# Altium PCB BaseArduino.PcbDoc
Units mm, origin at the board's own origin, x right, y up, seen from the top; angles counter-clockwise.
Board outline 68.58 x 53.34 mm, 2 copper layers (Top Layer, Bottom Layer); 43 components, 30 nets, 126 pads, 6 vias.
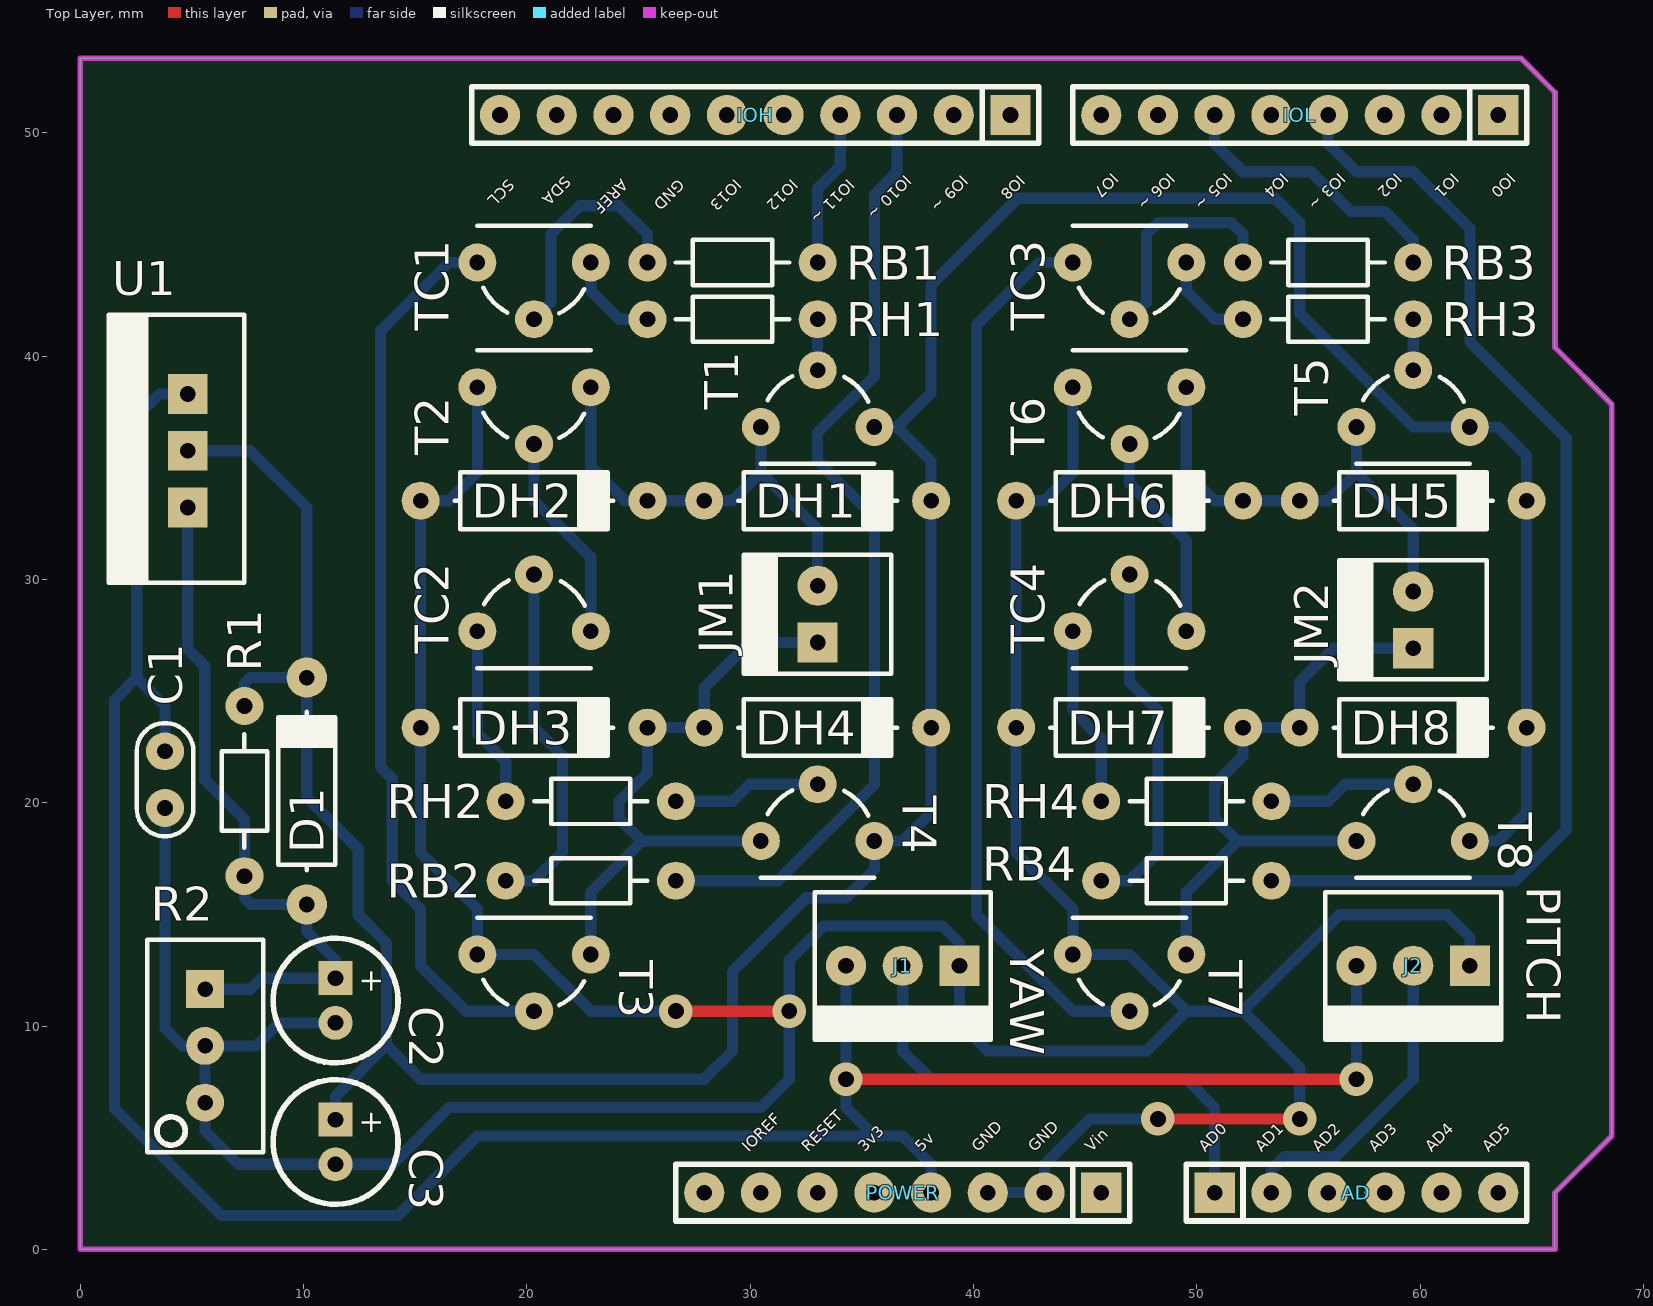
[diagram p0: Top Layer view]
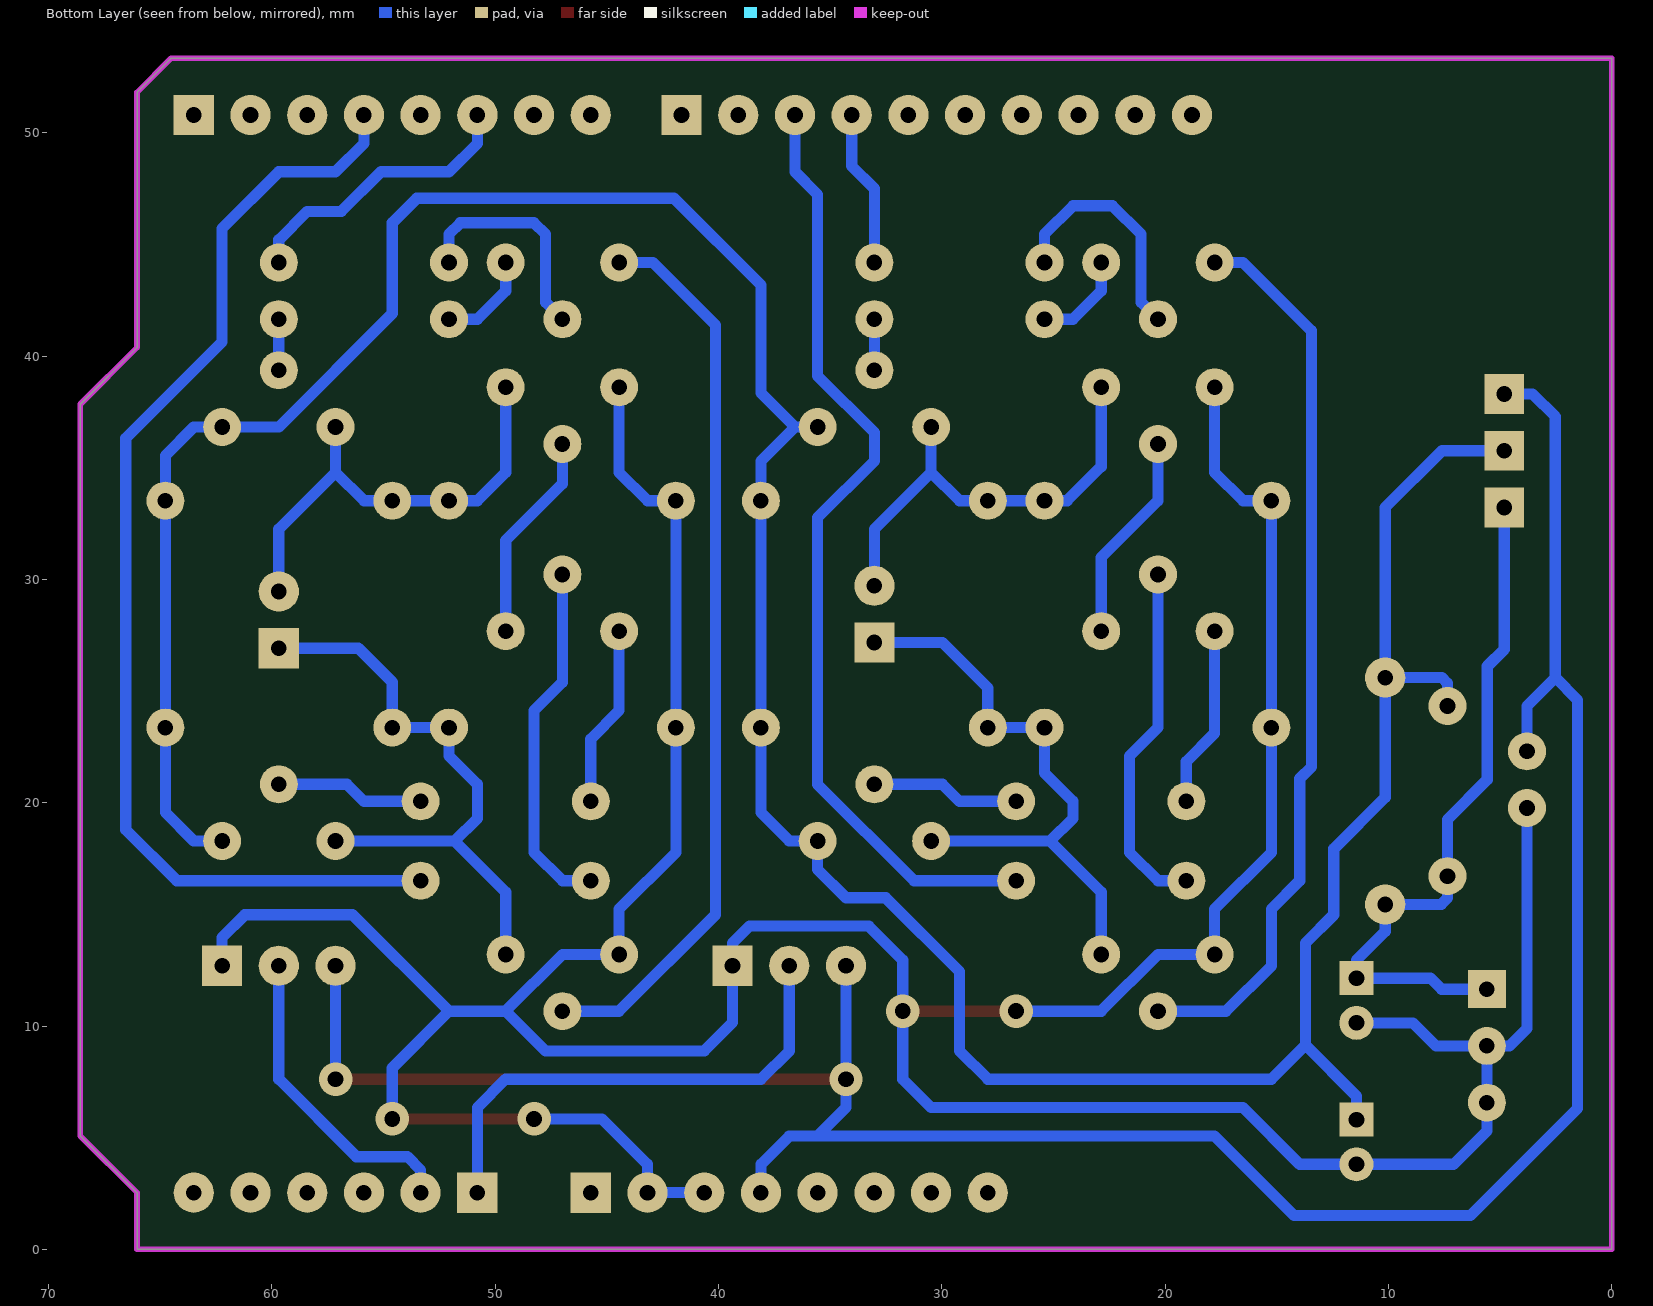
[diagram p1: Bottom Layer view, seen from below]
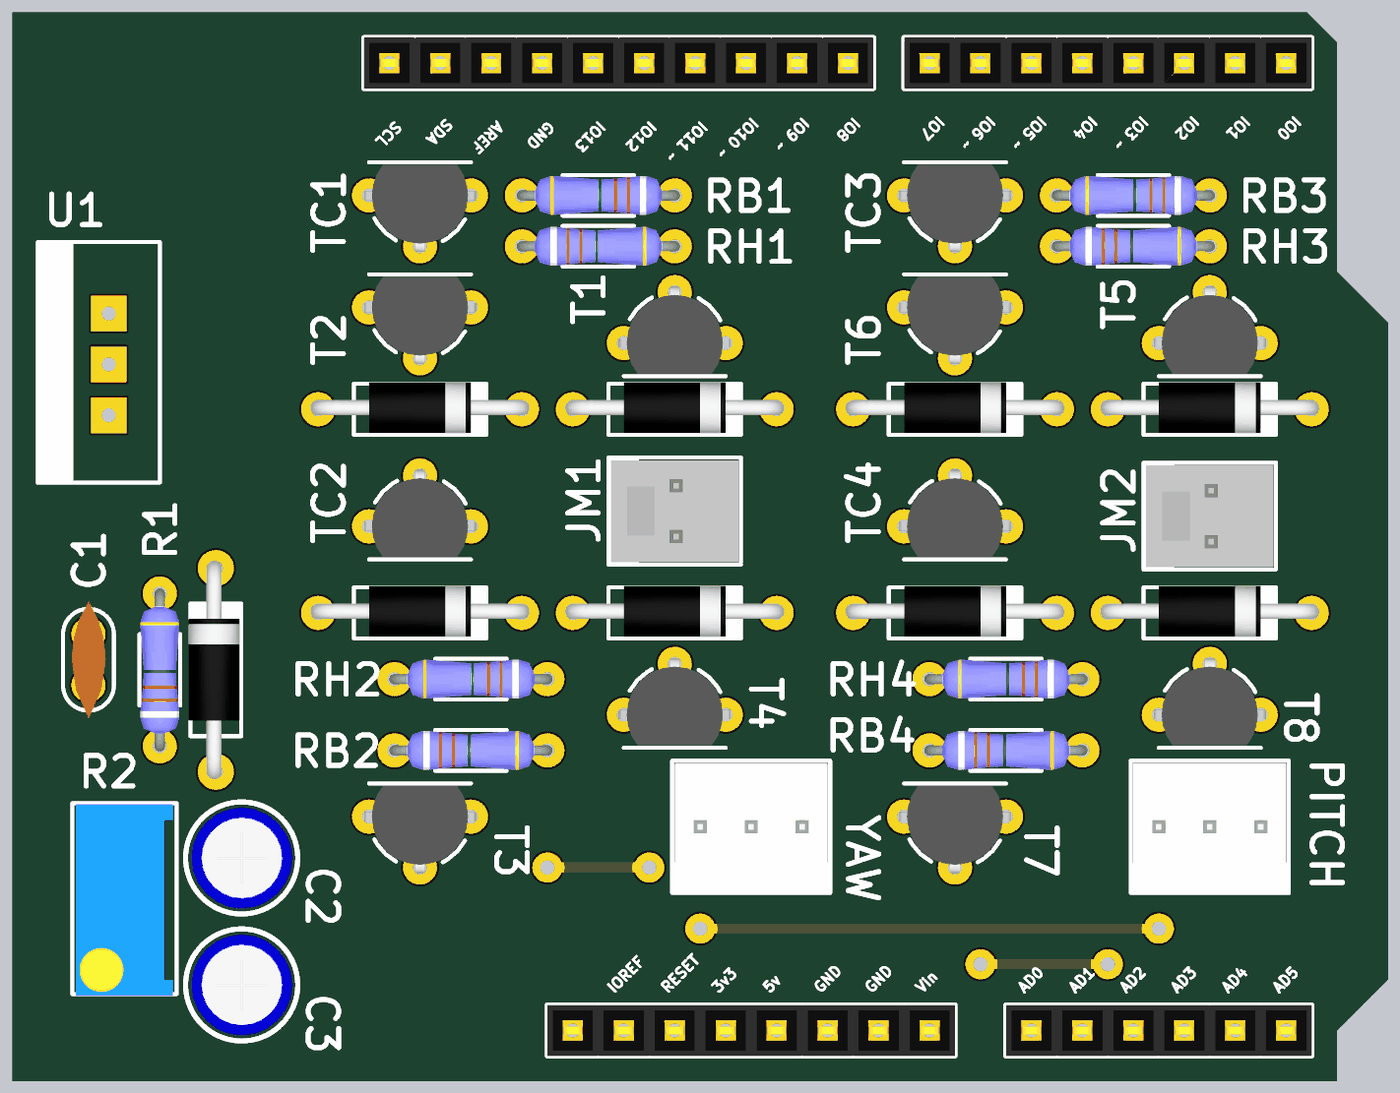
[diagram p2: 3D render of the assembled board from above, using the file's embedded part models]

## Layer stack, top to bottom
Top Solder: solder mask 0.0102, Solder Resist, Dk 3.5
Top Layer: signal copper 0.0356
Dielectric 1: dielectric 0.32, FR-4, Dk 4.8
Bottom Layer: signal copper 0.0356
Bottom Solder: solder mask 0.0102, Solder Resist, Dk 3.5

## Board outline
0,0 0,53.34 64.516,53.34 66.04,51.816 66.04,40.386 68.58,37.846 68.58,5.08 66.04,2.54 66.04,0

## Design rules (kind name [scope] priority, off if disabled: settings)
Clearance [All] p1: gap=0.4 ignorepadtopadclearanceinfootprint=FALSE
PolygonConnect [All] p1: connectstyle=Relief reliefconductorwidth=0.254 reliefentries=4 polygonreliefangle="90 Angle" airgapwidth=0.254
RoutingVias [All] p1: holewidth=0.711 width=1.5 viastyle="Through Hole" minholewidth=0.711 minwidth=1.5 maxholewidth=0.711 maxwidth=1.5
SolderMaskExpansion [All] p1: expansion=0.102
Width [All] p1: maxlimit=0.5 minlimit=0.5 preferedwidth=0.5
30 further rules are at their usual default settings.

## Components (designator, comment, footprint, x,y, rotation, side; value= is the part's Value field where it differs from the comment)
AD "AD" "Header 6x1 8.5mm" 50.8,2.54 r0 top
C1 "0.1u" CAP100 3.794,21.034 r270 top
C2 "10u" CAP100RP 11.43,11.144 r270 top
C3 "1u" CAP100RP 11.43,4.81 r270 top
D1 "1N4002" DO41#1 10.144,20.526 r90 top
DH1 "1N4148" DO41#2 33.02,33.528 r0 top
DH2 "1N4148" DO41#2 20.32,33.528 r0 top
DH3 "1N4148" DO41#2 20.32,23.368 r0 top
DH4 "1N4148" DO41#2 33.02,23.368 r0 top
DH5 "1N4148" DO41#2 59.69,33.528 r0 top
DH6 "1N4148" DO41#2 46.99,33.528 r0 top
DH7 "1N4148" DO41#2 46.99,23.368 r0 top
DH8 "1N4148" DO41#2 59.69,23.368 r0 top
IOH "IOH" "Header 10x1 8.5mm" 41.656,50.8 r180 top
IOL "IOL" "Header 8x1 8.5mm" 63.5,50.8 r180 top
J1 "YAW" MOLEX3 39.37,12.7 r180 top
J2 "PITCH" MOLEX3 62.23,12.7 r180 top
JM1 "MOTOR" MOLEX2 33.02,27.178 r90 top
JM2 "MOTOR" MOLEX2 59.69,26.924 r90 top
POWER "POWER_UNO" "Header 8x1 8.5mm" 45.72,2.54 r180 top
R1 "220" RES300 7.35,16.716 r90 top
R2 "5K" "PRESET V" 5.588,9.112 r270 top
RB1 "1K" RES300 33.02,44.196 r180 top
RB2 "1K" RES300 19.05,16.51 r0 top
RB3 "1K" RES300 59.69,44.196 r180 top
RB4 "1K" RES300 45.72,16.51 r0 top
RH1 "27" RES300 25.4,41.656 r0 top
RH2 "27" RES300 26.67,20.066 r180 top
RH3 "27" RES300 52.07,41.656 r0 top
RH4 "27" RES300 53.34,20.066 r180 top
T1 "2N3906" TO92 33.02,38.1 r180 top
T2 "2N3904" TO92 20.32,37.338 r0 top
T3 "2N3904" TO92 20.32,11.938 r0 top
T4 "2N3906" TO92 33.02,19.558 r180 top
T5 "2N3906" TO92 59.69,38.1 r180 top
T6 "2N3904" TO92 46.99,37.338 r0 top
T7 "2N3904" TO92 46.99,11.938 r0 top
T8 "2N3906" TO92 59.69,19.558 r180 top
TC1 "2N3904" TO92 20.32,42.926 r0 top
TC2 "2N3904" TO92 20.32,28.956 r180 top
TC3 "2N3904" TO92 46.99,42.926 r0 top
TC4 "2N3904" TO92 46.99,28.956 r180 top
U1 "LM317" "TO-220 V" 4.81,35.766 r90 top

## Footprints (in the part's own frame and the unit in brackets; to place one, negate y for a bottom-side part, rotate by r counter-clockwise, add the part's x,y. Pads: shape width x height; smd on the part's side, far side on the other; paste and mask are expansions set on the pad)
CAP100 [mm]
  round 1.7 hole 0.7: 1(-1.27,0) 2(1.27,0)
  silkscreen extent -2.54,-1.27 2.54,1.27, body extent -2.92,-0.84 2.92,0.86, height 6.12
CAP100RP [mm] "Body diameter 5mm"
  rect 1.524x1.524 hole 0.7: 1(-1,0)
  round 1.524 hole 0.7: 2(1,0)
  silkscreen extent -2.79,-2.79 2.79,2.79, body extent -2.53,-2.51 2.53,2.54, height 11.53
DO41#1 [mm]
  round 1.8 hole 0.7: 1(-5.08,0) 2(5.08,0)
  silkscreen extent -3.56,-1.27 3.56,1.27, body extent -5.46,-1.19 5.46,1.37, height 2.03
DO41#2 [mm]
  round 1.7 hole 0.7: 1(-5.08,0) 2(5.08,0)
  silkscreen extent -3.56,-1.27 3.56,1.27, body extent -5.46,-1.19 5.46,1.37, height 2.03
"Header 6x1 8.5mm" [mm] "Stackable 6 pin header"
  rect 1.8x1.8 hole 0.7: 1(0,0)
  round 1.8 hole 0.7: 2(2.54,0) 3(5.08,0) 4(7.62,0) 5(10.16,0) 6(12.7,0)
  silkscreen extent -1.27,-1.27 13.97,1.27, body extent -1.27,-1.27 13.97,1.27, height 8.5
"Header 8x1 8.5mm" [mm] "Stackable 8 pin header"
  rect 1.8x1.8 hole 0.7: 1(0,0)
  round 1.8 hole 0.7: 2(2.54,0) 3(5.08,0) 4(7.62,0) 5(10.16,0) 6(12.7,0) 7(15.24,0) 8(17.78,0)
  silkscreen extent -1.27,-1.27 19.05,1.27, body extent -1.27,-1.27 19.05,1.27, height 8.5
"Header 10x1 8.5mm" [mm] "Stackable 10 pin header"
  rect 1.8x1.8 hole 0.7: 1(0,0)
  round 1.8 hole 0.7: 2(2.54,0) 3(5.08,0) 4(7.62,0) 5(10.16,0) 6(12.7,0) 7(15.24,0) 8(17.78,0) 9(20.32,0) 10(22.86,0)
  silkscreen extent -1.27,-1.27 24.13,1.27, body extent -1.27,-1.27 24.13,1.27, height 8.5
MOLEX2 [mm]
  rect 1.8x1.8 hole 0.7: 1(0,0)
  round 1.8 hole 0.7: 2(2.54,0)
  silkscreen extent -1.4,-3.3 3.94,3.3, body extent -1.27,-3.17 3.81,3.18, height 10.74
MOLEX3 [mm]
  rect 1.8x1.8 hole 0.7: 1(0,0)
  round 1.8 hole 0.7: 2(2.54,0) 3(5.08,0)
  silkscreen extent -1.4,-3.3 6.48,3.3, body extent -1.27,-3.17 6.35,3.18, height 10.74
"PRESET V" [mm]
  rect 1.7x1.7 hole 0.7: 1(-2.54,0)
  round 1.7 hole 0.7: 2(0,0) 3(2.54,0)
  silkscreen extent -4.76,-2.6 4.76,2.6, body extent -4.7,-2.42 4.83,2.42, height 11.55
RES300 [mm]
  round 1.7 hole 0.7: 1(0,0) 2(7.62,0)
  silkscreen extent 1.27,-1.02 6.35,1.02, body extent -0.25,-0.97 7.87,0.97, height 2.01
TO92 [mm]
  round 1.7 hole 0.7: 1(0,-1.27) 2(2.54,1.27) 3(-2.54,1.27)
  silkscreen extent -2.54,-1 2.54,2.92, body extent -2.79,-1.55 2.79,2.79, height 8
"TO-220 V" [mil]
  rect 70x70 hole 27.56: 1(-100,0) 2(0,0) 3(100,0)
  silkscreen extent -232,-100 240,139, body extent -197,-79 197,118, height 709

## Part data
C1: library part CAP
C2 C3: library part CAPPOL
D1: library part DIODO
DH1 DH2 DH3 DH4 DH5 DH6 DH7 DH8: library part "DIODO SCHOTTKY"
J1 J2: library part MOLEX3
JM1 JM2: library part MOLEX2
R1 RB1 RB2 RB3 RB4 RH1 RH2 RH3 RH4: library part RES
R2: library part PRESET
T1 T4 T5 T8: library part "TRANSISTOR PNP"
T2 T3 T6 T7 TC1 TC2 TC3 TC4: library part "TRANSISTOR NPN"
U1: "IC REG ADJ 1.5A 3 TERM TO-220"

## Via types
v1: diameter 1.5, hole 0.711, Top Layer to Bottom Layer, 6 vias

## Nets (pads, with @x,y where several pads share a name; then routed paths per layer and width w, separated by ;. In a path a pad name is that pad's centre, name@x,y a point inside that pad or via, vN(x,y) a via of type N, cw(c..) or ccw(c..) an arc to the next point about the centre after c; other vN are vias at no path point)
3V7: C3.1 D1.2 DH1.2 DH4.2 DH5.2 DH8.2 R1.2 T1.3 T4.3 T5.3 T8.3 U1.2 | length 153.3
  Bottom Layer w0.5: U1.2 7.604,35.766 10.144,33.226 D1.2 ; R1.2 7.35,25.352 7.604,25.606 D1.2 ; C3.1 11.43,6.858 13.716,9.144 ; T1.3 36.576,36.83 ; T8.3 63.5,18.288 64.77,19.558 DH8.2 DH5.2 64.77,35.56 63.5,36.83 T5.3 59.69,36.83 54.61,41.91 54.61,45.974 53.51,47.074 41.994,47.074 38.1,43.18 38.1,38.354 36.576,36.83 ; D1.2 10.144,20.24 12.446,17.938 12.446,14.986 13.716,13.716 13.716,9.144 ; 13.716,9.144 15.24,7.62 27.94,7.62 29.21,8.89 29.21,12.446 32.512,15.748 34.29,15.748 35.56,17.018 T4.3 36.83,18.288 38.1,19.558 DH4.2 DH1.2 38.1,35.306 36.576,36.83
5V: C1.1 J1.3 J2.3 POWER.4 U1.3 | length 115.8
  Top Layer w0.5: v1(34.29,7.62) v1(57.15,7.62)
  Bottom Layer w0.5: C1.1 3.794,24.336 2.524,25.606 ; U1.3 3.54,38.306 2.524,37.29 2.524,25.606 ; J1.3 v1(34.29,7.62) 34.29,6.35 35.56,5.08 ; POWER.4 38.1,3.81 36.83,5.08 35.56,5.08 ; v1(57.15,7.62) J2.3 ; 2.524,25.606 1.524,24.606 1.524,6.318 6.318,1.524 14.224,1.524 17.78,5.08 35.56,5.08
GND: C1.2 C2.2 C3.2 DH2.1 DH3.1 DH6.1 DH7.1 J1.1 J2.1 POWER.2 POWER.3 R2.2 R2.3 T2.3 T3.3 T6.3 T7.3 | length 195.1
  Top Layer w0.5: v1(26.67,10.668) v1(31.75,10.668) ; v1(48.26,5.842) v1(54.61,5.842)
  Bottom Layer w0.5: C1.2 3.794,9.89 4.572,9.112 R2.2 ; C2.2 8.906,10.144 7.874,9.112 R2.2 ; T2.3 17.78,34.798 16.51,33.528 DH2.1 DH3.1 15.24,17.78 17.78,15.24 T3.3 20.32,13.208 22.86,10.668 v1(26.67,10.668) ; POWER.3 POWER.2 43.18,3.81 45.212,5.842 v1(48.26,5.842) ; T6.3 44.45,34.798 43.18,33.528 DH6.1 DH7.1 41.91,17.78 44.45,15.24 T7.3 46.99,13.208 49.53,10.668 ; v1(54.61,5.842) 54.61,8.128 52.07,10.668 ; J2.1 62.23,13.97 61.214,14.986 56.388,14.986 52.07,10.668 ; R2.2 R2.3 5.588,5.302 7.08,3.81 C3.2 13.97,3.81 16.51,6.35 30.48,6.35 31.75,7.62 v1(31.75,10.668) 31.75,12.954 33.274,14.478 38.608,14.478 39.37,13.716 J1.1 39.37,10.16 40.64,8.89 47.752,8.89 49.53,10.668 ; 49.53,10.668 52.07,10.668
ML1: IOL.6 RB3.1 | length 13
  Bottom Layer w0.5: IOL.6 50.8,49.53 52.07,48.26 55.118,48.26 56.896,46.482 58.42,46.482 59.69,45.212 RB3.1
ML2: IOL.4 RB4.2 | length 52.1
  Bottom Layer w0.5: RB4.2 64.262,16.51 66.548,18.796 66.548,36.322 62.23,40.64 62.23,45.72 59.69,48.26 57.15,48.26 55.88,49.53 IOL.4
MR1: IOH.4 RB1.1 | length 7
  Bottom Layer w0.5: RB1.1 33.02,47.498 34.036,48.514 IOH.4
MR2: IOH.3 RB2.2 | length 43.2
  Bottom Layer w0.5: RB2.2 31.242,16.51 35.56,20.828 35.56,32.766 33.02,35.306 33.02,36.576 35.56,39.116 35.56,47.244 36.576,48.26 IOH.3
NetC2_1: C2.1 D1.1 R1.1 R2.1 U1.1 | length 31.3
  Bottom Layer w0.5: U1.1 4.81,26.876 5.572,26.114 5.572,21.034 7.35,19.256 R1.1 7.35,15.732 7.636,15.446 D1.1 10.144,14.24 11.43,12.954 C2.1 8.112,12.144 7.62,11.652 R2.1
NetDH1_1: DH1.1 DH2.2 JM1.2 T1.2 T2.2 | length 20.5
  Bottom Layer w0.5: T2.2 22.86,35.052 24.384,33.528 DH2.2 DH1.1 29.21,33.528 30.48,34.798 ; T1.2 30.48,34.798 ; JM1.2 33.02,32.258 30.48,34.798
NetDH3_2: DH3.2 DH4.1 JM1.1 T3.2 T4.2 | length 27.6
  Bottom Layer w0.5: T3.2 22.86,16.002 25.146,18.288 ; T4.2 25.146,18.288 ; JM1.1 29.972,27.178 27.94,25.146 DH4.1 DH3.2 25.4,21.336 24.13,20.066 24.13,19.304 25.146,18.288
NetDH5_1: DH5.1 DH6.2 JM2.2 T5.2 T6.2 | length 20.9
  Bottom Layer w0.5: T6.2 49.53,34.798 50.8,33.528 DH6.2 DH5.1 55.88,33.528 57.15,34.798 ; T5.2 57.15,34.798 ; JM2.2 59.69,32.258 57.15,34.798
NetDH7_2: DH7.2 DH8.1 JM2.1 T7.2 T8.2 | length 27.7
  Bottom Layer w0.5: T7.2 49.53,16.002 51.816,18.288 ; T8.2 51.816,18.288 ; JM2.1 56.134,26.924 54.61,25.4 DH8.1 DH7.2 52.07,22.098 50.8,20.828 50.8,19.304 51.816,18.288
NetRB1_2: RB1.2 TC1.1 | length 10.8
  Bottom Layer w0.5: TC1.1 21.082,42.418 21.082,45.466 22.352,46.736 24.13,46.736 25.4,45.466 RB1.2
NetRB2_1: RB2.1 TC2.1 | length 16
  Bottom Layer w0.5: RB2.1 20.32,16.51 21.59,17.78 21.59,22.098 20.32,23.368 TC2.1
NetRB3_2: RB3.2 TC3.1 | length 10.1
  Bottom Layer w0.5: TC3.1 47.752,42.418 47.752,45.466 48.26,45.974 51.562,45.974 52.07,45.466 RB3.2
NetRB4_1: RB4.1 TC4.1 | length 16
  Bottom Layer w0.5: RB4.1 46.99,16.51 48.26,17.78 48.26,24.13 46.99,25.4 TC4.1
NetRH1_1: RH1.1 TC1.2 | length 4.3
  Bottom Layer w0.5: TC1.2 22.86,42.926 24.13,41.656 RH1.1
NetRH1_2: RH1.2 T1.1 | length 2.3
  Bottom Layer w0.5: T1.1 RH1.2
NetRH2_1: RH2.1 T4.1 | length 6.7
  Bottom Layer w0.5: RH2.1 29.21,20.066 29.972,20.828 T4.1
NetRH2_2: RH2.2 TC2.2 | length 8.1
  Bottom Layer w0.5: TC2.2 17.78,23.114 19.05,21.844 RH2.2
NetRH3_1: RH3.1 TC3.2 | length 4.3
  Bottom Layer w0.5: TC3.2 49.53,42.926 50.8,41.656 RH3.1
NetRH3_2: RH3.2 T5.1 | length 2.3
  Bottom Layer w0.5: T5.1 RH3.2
NetRH4_1: RH4.1 T8.1 | length 6.7
  Bottom Layer w0.5: RH4.1 55.88,20.066 56.642,20.828 T8.1
NetRH4_2: RH4.2 TC4.2 | length 8.1
  Bottom Layer w0.5: TC4.2 44.45,24.13 45.72,22.86 RH4.2
NetT2_1: T2.1 TC2.3 | length 9.4
  Bottom Layer w0.5: T2.1 20.32,33.528 22.86,30.988 TC2.3
NetT3_1: T3.1 TC1.3 | length 40.7
  Bottom Layer w0.5: 13.446,41.148 13.446,21.606 13.97,21.082 13.97,16.51 15.24,15.24 15.24,12.7 17.272,10.668 T3.1 ; 13.462,41.148 16.51,44.196 TC1.3
NetT6_1: T6.1 TC4.3 | length 9.4
  Bottom Layer w0.5: T6.1 46.99,34.29 49.53,31.75 TC4.3
NetT7_1: T7.1 TC3.3 | length 40.5
  Bottom Layer w0.5: TC3.3 42.926,44.196 40.132,41.402 40.132,14.986 44.45,10.668 T7.1
Pitch: AD.2 J2.2 | length 14.1
  Bottom Layer w0.5: AD.2 53.34,3.556 53.936,4.152 56.222,4.152 59.69,7.62 J2.2
Yaw: AD.1 J1.2 | length 22.6
  Bottom Layer w0.5: J1.2 36.83,8.89 38.1,7.62 49.53,7.62 50.8,6.35 AD.1
pads on no net: AD.3 AD.4 AD.5 AD.6 IOH.1 IOH.2 IOH.5 IOH.6 IOH.7 IOH.8 IOH.9 IOH.10 IOL.1 IOL.2 IOL.3 IOL.5 IOL.7 IOL.8 POWER.1 POWER.5 POWER.6 POWER.7 POWER.8

## Keep-outs
Keep-Out Layer:
  the board outline again, w0.254

## Silkscreen, mask and mechanical layers (free items; w line width, h text height)
Top Overlay:
  text "IO7" at 46.189,48.232 h0.51 r225
  text "IO6 ~" at 48.729,48.232 h0.51 r225
  text "IO5 ~" at 51.269,48.232 h0.51 r225
  text "IO4" at 53.809,48.232 h0.51 r225
  text "IO3 ~" at 56.349,48.232 h0.51 r225
  text "IO2" at 58.889,48.232 h0.51 r225
  text "IO1" at 61.429,48.232 h0.51 r225
  text "IO0" at 63.969,48.232 h0.51 r225
  text "IO10 ~" at 36.918,48.158 h0.51 r225
  text "IO9 ~" at 39.458,48.158 h0.51 r225
  text "IO8" at 41.998,48.158 h0.51 r225
  text "SDA" at 21.678,48.105 h0.51 r225
  text "SCL" at 19.138,47.978 h0.51 r225
  text "AREF" at 24.218,47.978 h0.51 r225
  text "GND" at 26.758,47.978 h0.51 r225
  text "IO13" at 29.298,47.978 h0.51 r225
  text "IO12" at 31.838,47.978 h0.51 r225
  text "IO11 ~" at 34.378,47.978 h0.51 r225
  text "PITCH" at 64.77,16.256 h1.52 r270
  text "YAW" at 41.656,13.462 h1.52 r270
  text "IOREF" at 29.925,4.332 h0.51 r45
  text "RESET" at 32.592,4.332 h0.51 r45
  text "3v3" at 35.132,4.332 h0.51 r45
  text "5v" at 37.672,4.332 h0.51 r45
  text "GND" at 40.212,4.332 h0.51 r45
  text "GND" at 42.752,4.332 h0.51 r45
  text "Vin" at 45.292,4.332 h0.51 r45
  text "AD0" at 50.372,4.332 h0.51 r45
  text "AD1" at 52.912,4.332 h0.51 r45
  text "AD2" at 55.452,4.332 h0.51 r45
  text "AD3" at 57.992,4.332 h0.51 r45
  text "AD4" at 60.532,4.332 h0.51 r45
  text "AD5" at 63.072,4.332 h0.51 r45

## Text inside footprints (layer, text, board x,y; h text height)
C2: Top Overlay "+" at 12.598,12.592 h1.02 r270
C3: Top Overlay "+" at 12.598,6.258 h1.02 r270